# Altium PCB main.PcbDoc (part 2 of 2)
Units mm, origin at the board's own origin, x right, y up, seen from the top; angles counter-clockwise.
Board outline 97 x 82.5 mm, 4 copper layers (Top Layer, +5/3.3, GND, Bottom Layer), stack 1.656 mm thick; 92 components, 74 nets, 382 pads, 341 vias.
Unrouted connection lines stored in the file: 1.
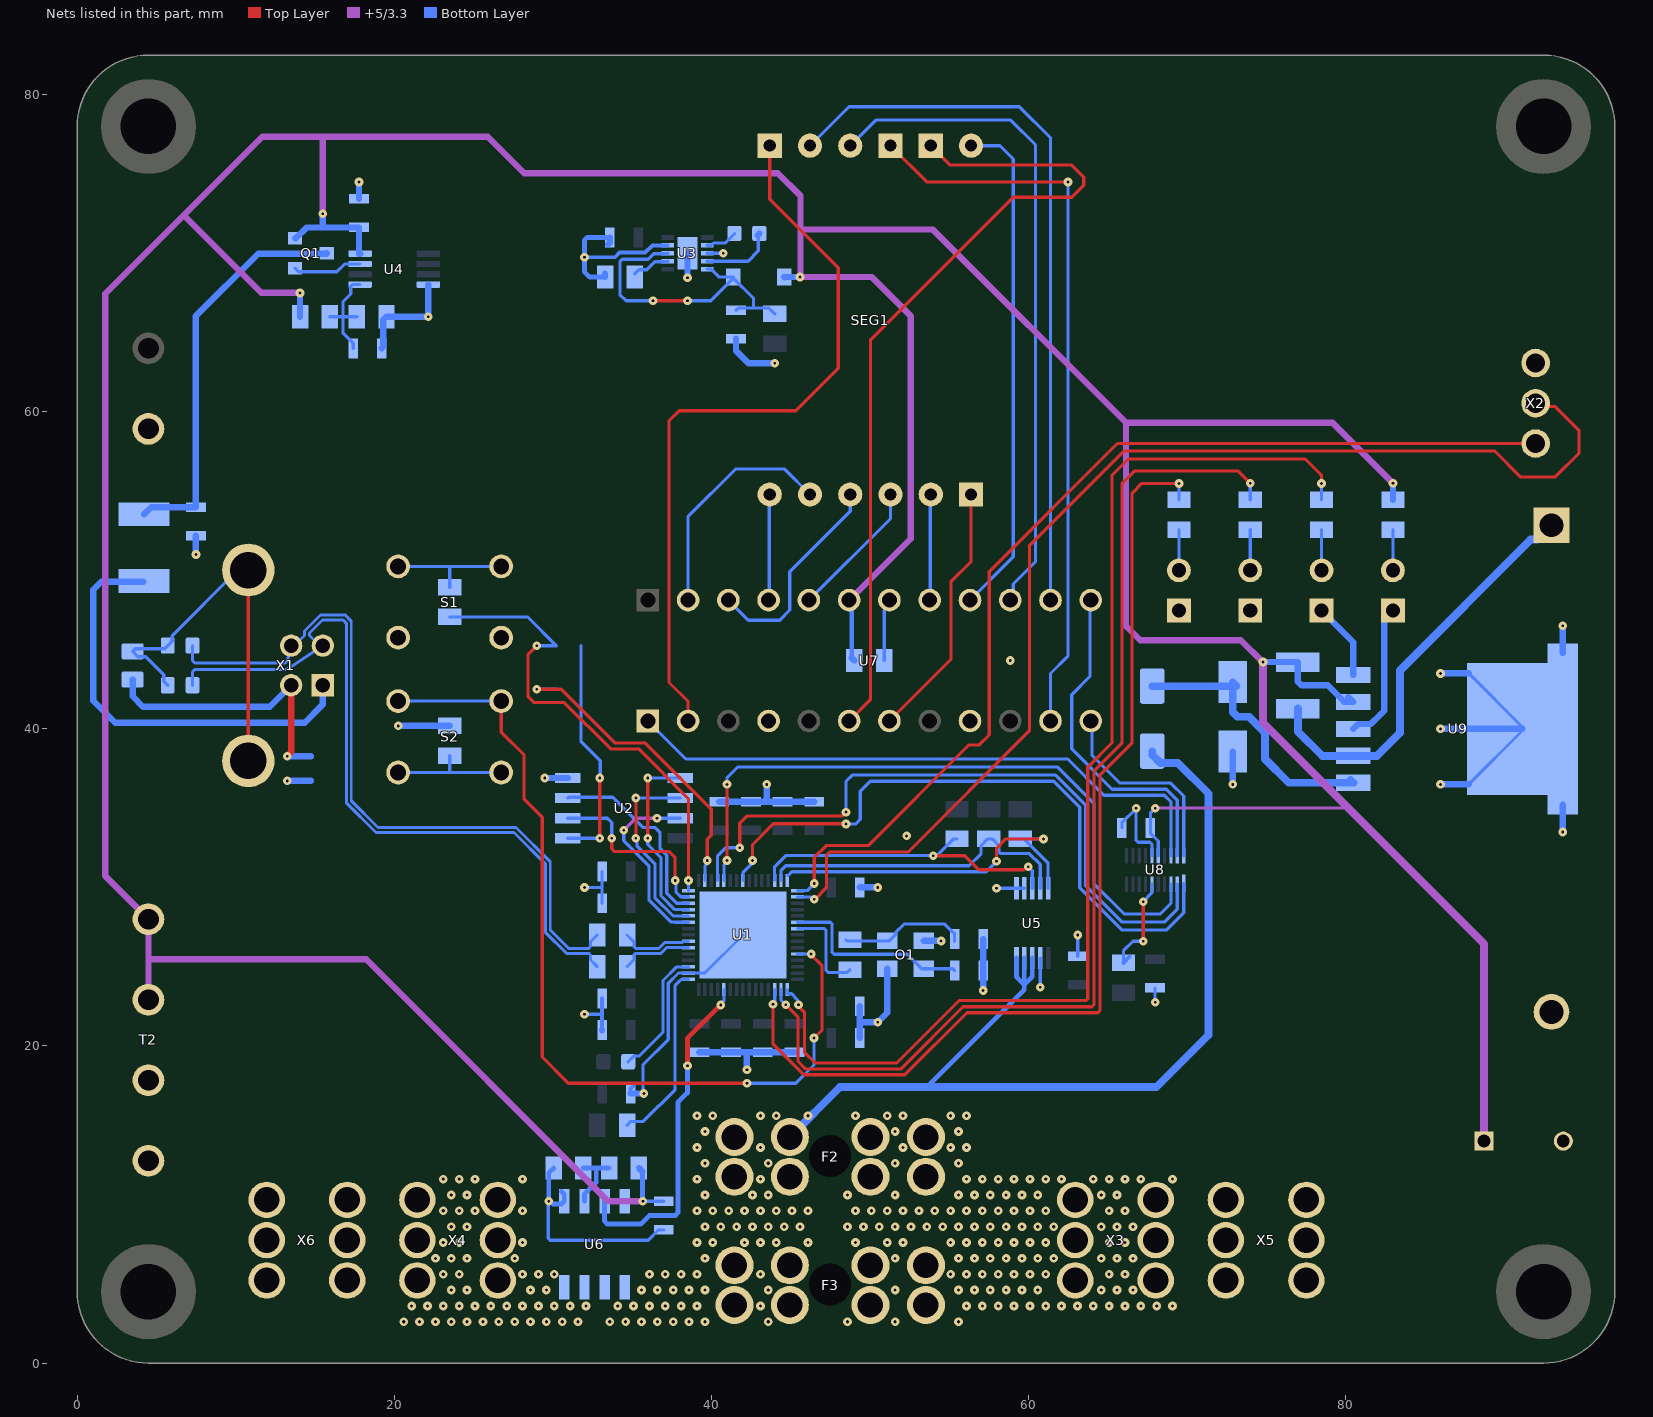
[diagram p4: the nets of this part, all layers, seen from the top]

## Via types
v1: diameter 0.55, hole 0.2, Top Layer to Bottom Layer, 240 vias
v2: diameter 0.55, hole 0.175, Top Layer to Bottom Layer, 101 vias

## Nets (pads, with @x,y where several pads share a name; then routed paths per layer and width w, separated by ;. In a path a pad name is that pad's centre, name@x,y a point inside that pad or via, vN(x,y) a via of type N, cw(c..) or ccw(c..) an arc to the next point about the centre after c; other vN are vias at no path point) (continued)
+5V: C23.2 C26.1 C28.1 C29.2 D5.2 L4.2 Q1.2 R11.2 R13.1 R16.1 R20.2 T2.1 T2.2 U4.8 U6.8 U7.19 U8.16 U9.4 | length 324.2
  +5/3.3 w0.2: v2(68,35) 80.189,35 80.2,34.989
  +5/3.3 w0.4: T2.2@4.5,22.92 4.5,25.46 ; v2(14.06,67.5) 11.621,67.5 6.731,72.39 ; v2(15.5,72.5) 15.5,77.222 15.621,77.343 ; v2(35.687,10.204) 33.484,10.204 18.228,25.46 4.5,25.46 ; v2(45.6,68.5) 50.118,68.5 52.578,66.04 52.578,51.998 U7.19@48.7,48.12 ; v2@45.627,68.527 45.627,71.501 ; v2@74.803,44.197 73.407,45.593 67.056,45.593 66.167,46.482 66.167,59.309 ; v2(83,55.5) 79.191,59.309 66.167,59.309 ; 4.5,25.46 T2.1@4.5,28 1.778,30.722 1.778,67.437 6.731,72.39 ; 6.731,72.39 11.684,77.343 15.621,77.343 ; 15.621,77.343 25.908,77.343 28.194,75.057 44.196,75.057 45.627,73.626 45.627,71.501 ; 45.627,71.501 53.975,71.501 66.167,59.309
  +5/3.3 w0.5: v2(74.803,44.216) 74.803,40.386 80.2,34.989 88.75,26.439 C26.1@88.75,14
  Bottom Layer w0.2: v2(35.687,10.204) 36.996,10.204 C29.2@37,10.2 ; v2(68,35) 68,34.975 67.7,34.675 C28.1@67.7,33.75 67.7,33.425 68.2,32.925 U8.16@68.2,32
  Bottom Layer w0.3: U6.8@34.544,10.204 v2(35.687,10.204) ; v2@35.658,10.233 R20.2@35.658,12.082 ; R13.1@48.865,44.474 U7.19@48.865,47.955
  Bottom Layer w0.4: Q1.2@13.75,70.95 13.8,70.95 14.478,71.628 15.4,71.628 ; R11.2@14.06,66 v2(14.06,67.5) ; v2(15.5,72.5) 15.5,71.728 15.4,71.628 ; U4.8@17.85,69.975 17.78,69.975 C23.2@17.78,71.628 15.4,71.628 ; R20.2@35.44,12.3 R20.2@35.658,12.082 ; D5.2@44.63,68.47 D5.2@44.6,68.5 v2(45.6,68.5) ; R13.1@48.865,44.474 R13.1@49.03,44.31 ; v2(74.803,44.216) L4.2@77,44.216 77,42.984 77.234,42.75 78.88,42.75 79.93,41.7 U9.4@80.5,41.7 U9.4@80.19,42.01 ; R16.1@83,54.44 v2(83,55.5)
Battery+: D6.2 F2.1 F3.1 U5.8 U5.9 U5.10 U6.1 U6.2 | length 63.6
  Bottom Layer w0.3: 53.53,17.335 53.594,17.399 59.75,23.555 59.75,23.876 ; U5.10@59.25,25.55 59.25,24.376 59.75,23.876 ; U5.9@59.75,25.55 59.75,23.876 ; U5.8@60.25,25.55 60.25,24.376 59.75,23.876
  Bottom Layer w0.5: F2.1@44.96,14.25 48.109,17.399 53.594,17.399 68.072,17.399 71.374,20.701 71.374,35.902 69.426,37.85 68.332,37.85 67.817,38.365 D6.2@67.817,38.59
  other v1: 33.6,2.6 34.6,2.6 35.6,2.6 36.6,2.6 37.6,2.6 38.6,2.6 39.6,2.6 43.6,2.6 34.1,3.6 35.1,3.6 36.1,3.6 37.1,3.6 38.1,3.6 39.1,3.6 43.1,3.6 35.6,4.6 36.6,4.6 37.6,4.6 38.6,4.6 39.6,4.6 43.6,4.6 36.1,5.6 37.1,5.6 38.1,5.6 39.1,5.6 43.1,5.6 39.6,6.6 39.1,7.6 40.1,7.6 42.1,7.6 43.1,7.6 44.1,7.6 46.1,7.6 39.6,8.6 40.6,8.6 41.6,8.6 42.6,8.6 43.6,8.6 44.6,8.6 45.6,8.6 39.1,9.6 40.1,9.6 41.1,9.6 42.1,9.6 43.1,9.6 44.1,9.6 45.1,9.6 46.1,9.6 39.6,10.6 42.6,10.6 43.6,10.6 39.1,11.6 43.1,11.6 39.6,12.6 43.6,12.6 39.1,13.6 43.1,13.6 39.6,14.6 39.1,15.6 40.1,15.6 43.1,15.6 44.1,15.6 46.1,15.6
"Current Sense": U1.41 U6.7 | length 21.5
  Top Layer w0.3: v2(38.5,18.75) 38.5,20.484 v2(40.6,22.584)
  Bottom Layer w0.2: v2@40.6,22.652 40.8,22.852 U1.41@40.8,23.56
  Bottom Layer w0.3: U6.7@33.274,10.204 33.274,8.939 33.45,8.763 35.56,8.763 36.097,9.3 37.724,9.3 37.9,9.476 37.9,16.437 38.5,17.037 v2(38.5,18.75)
D_DIG_0: SEG1.12 U7.2 | length 47.3
  Top Layer w0.2: U7.2@38.54,40.5 38.54,41.724 37.338,42.926 37.338,59.436 37.973,60.071 45.339,60.071 48.006,62.738 48.006,69.089 43.688,73.407 SEG1.12@43.688,76.786
D_DIG_1: SEG1.9 U7.11 | length 46.6
  Top Layer w0.203: SEG1.9@51.308,76.786 53.594,74.5 v2(62.5,74.5)
  Bottom Layer w0.203: U7.11@61.4,40.5 61.4,43.493 62.5,44.593 v2(62.5,74.5)
D_DIG_2: SEG1.8 U7.6 | length 53.2
  Top Layer w0.2: U7.6@48.7,40.5 50.038,41.838 50.038,64.516 59.055,73.533 62.738,73.533 63.5,74.295 63.5,74.803 62.738,75.565 55.069,75.565 SEG1.8@53.848,76.786
  Bottom Layer w0.203: SEG1.8@53.848,76.786 SEG1.8@53.975,76.659
D_DIG_3: SEG1.6 U7.7 | length 16.4
  Top Layer w0.2: U7.7@51.24,40.5 55.118,44.378 55.118,49.276 56.388,50.546 SEG1.6@56.388,54.786
D_ISET: R13.2 U7.18 | length 3.9
  Bottom Layer w0.203: R13.2@50.91,44.31 50.91,47.459 51.24,47.789 U7.18@51.24,48.12
"D_LOAD (C\S\\)": U1.8 U8.1 | length 41.4
  Top Layer w0.203: v2(42.6,31.7) 42.6,32.694 43.921,34.015 48.48,34.015 v2@48.498,33.998
  Bottom Layer w0.203: U1.8@42,30.44 42.008,30.448 42.008,30.959 v2@42.547,31.498 ; v2(48.5,34) 49.113,34 49.403,34.29 49.403,36.068 50.038,36.703 61.595,36.703 63.246,35.052 63.246,29.972 65.913,27.305 68.707,27.305 69.8,28.398 U8.1@69.8,30.25
"D_LOAD (C\S\\) 5V": U7.12 U8.20 | length 12.8
  Bottom Layer w0.2: U7.12@63.94,40.5 64.008,40.432 64.008,38.354 65.786,36.576 68.987,36.576 69.8,35.764 U8.20@69.8,32
D_N: R3.2 X1.2 Z2.2 | length 47.8
  Bottom Layer w0.185: Z2.2@7.28,42.75 7.28,43.527 cw(c7.498,43.527) 7.498,43.744 9.525,43.744 13.049,43.744 ccw(c13.049,44.374) 13.395,43.848 15.166,45.011 ccw(c15.047,45.193) 15.174,45.016 X1.2@15.5,45.25 X1.2@15.266,45.016 ; X1.2@15.298,45.25 14.656,45.892 14.656,46.045 15.474,46.863 16.782,46.863 16.98,46.665 16.98,44.537 16.98,42.926 16.98,36.449 16.98,35.344 18.854,33.47 27.559,33.47 29.533,31.496 29.533,27.176 30.864,25.844 32.274,25.844 32.383,25.735 32.383,25.428 R3.2@32.81,25
D_P: R2.2 X1.3 Z1.2 | length 46.2
  Bottom Layer w0.185: Z1.2@7.28,45.25 7.28,44.374 ccw(c7.498,44.374) 7.498,44.156 9.525,44.156 13.049,44.156 ccw(c13.049,44.374) 13.26,44.32 X1.3@13.5,45.25 ; X1.3@13.936,45.484 14.344,45.892 14.344,46.175 15.345,47.175 16.912,47.175 17.293,46.795 17.293,44.537 17.293,42.926 17.293,36.449 17.293,35.473 18.984,33.782 27.688,33.782 29.845,31.625 29.845,27.305 30.993,26.157 32.274,26.157 32.383,26.265 32.383,26.573 R2.2@32.81,27
D_Seg_A: SEG1.11 U7.14 | length 46.2
  Bottom Layer w0.203: SEG1.11@46.228,76.786 48.69,79.248 59.436,79.248 61.4,77.284 U7.14@61.4,48.12
D_Seg_B: SEG1.7 U7.16 | length 32
  Bottom Layer w0.203: U7.16@56.32,48.12 59.055,50.855 59.055,75.946 58.215,76.786 SEG1.7@56.388,76.786
D_Seg_C: SEG1.4 U7.20 | length 8.8
  Bottom Layer w0.203: U7.20@46.16,48.12 51.308,53.268 SEG1.4@51.308,54.786
D_Seg_D: SEG1.2 U7.23 | length 14.9
  Bottom Layer w0.203: U7.23@38.54,48.12 38.54,53.399 41.529,56.388 44.626,56.388 SEG1.2@46.228,54.786
D_Seg_DP: SEG1.3 U7.22 | length 13.5
  Bottom Layer w0.203: U7.22@41.08,48.12 42.345,46.855 44.315,46.855 44.958,47.498 44.958,49.911 48.766,53.719 48.766,54.784 SEG1.3@48.768,54.786
D_Seg_E: SEG1.1 U7.21 | length 6.7
  Bottom Layer w0.203: U7.21@43.62,48.12 43.654,48.154 43.654,54.752 SEG1.1@43.688,54.786
D_Seg_F: SEG1.10 U7.15 | length 42.4
  Bottom Layer w0.203: SEG1.10@48.768,76.786 50.384,78.402 58.885,78.402 60.452,76.835 60.452,50.546 59.043,49.137 59.043,48.303 U7.15@58.86,48.12
D_Seg_G: SEG1.5 U7.17 | length 6.7
  Bottom Layer w0.203: U7.17@53.78,48.12 53.814,48.154 53.814,54.752 SEG1.5@53.848,54.786
DX_N: R3.1 U1.51 | length 4.6
  Bottom Layer w0.185: R3.1@34.69,25 35.117,25.428 35.117,25.735 35.226,25.844 36.825,25.844 37.201,26.219 38.201,26.219 38.203,26.217 38.543,26.217 U1.51@38.56,26.2
DX_P: R2.1 U1.52 | length 4.6
  Bottom Layer w0.185: R2.1@34.69,27 35.117,26.573 35.117,26.265 35.226,26.157 36.696,26.157 37.071,26.532 38.187,26.532 38.255,26.6 U1.52@38.56,26.6 U1.52@38.56,26.6
"Flash SS": J1.2 J2.2 J3.2 U2.1 | length 14.7
  Top Layer w0.203: v2(32.963,33.095) v2(32.963,36.905)
  Bottom Layer w0.203: U2.1@30.95,33.095 v2(32.963,33.095) ; J3.2@31.78,45.25 J2.2@31.78,42.5 J1.2@31.78,39.75 31.78,39.22 33,38 33,36.942 v2(32.963,36.905)
GND: C1.1 C2.1 C3.1 C4.1 C5.1 C6.1 C7.1 C8.1 C9.1 C10.1 C11.2 C12.1 C13.1 C14.1 C15.1 C16.1 C17.1 C18.1 C19.2 C20.2 C21.1 C22.1 C23.1 C24.1 C25.2 C26.2 C27.2 C28.2 C29.1 D1.2 D2.2 D3.2 D4.2 D7.2 J4.1 O1.2 O1.4 R10.1 R12.1 R15.2 R21.1 S1.3 S1.4 T1.2 T2.3 T2.4 U1.47 U1.61 U2.4 U3.3 U3.9 U3.11 U4.4 U5.1 U5.2 U5.7 U6.5 U7.4 U7.9 U8.15 U9.3 U9.5 U9.6 X2.3 X5.1 X6.1 | length 143.6
  Bottom Layer w0.2: v2(29.75,10.204) 29.718,10.172 29.718,7.864 29.835,7.747 36.022,7.747 36.675,8.4 C29.1@37,8.4 ; v2(32,30) 33.11,30 ; C7.1@33.11,29 33.11,30 ; C6.1@33.11,31 33.11,30 ; v2(35.75,17) 35.687,17.063 35.687,18.796 37.29,20.399 37.29,23.954 37.936,24.6 U1.47@38.56,24.6 39.6,24.6 U1.61@42,27 ; U3.3@39.75,70 v2(40.75,70) ; v2(58,29.95) U5.1@59.25,29.95 U5.2@59.75,29.95 ; v2(60.75,23.7) U5.7@60.75,25.55 ; C19.2@63.119,25.65 v2(63.119,27) ; C28.2@65.9,33.75 65.9,34.075 66.8,34.975 v2(66.8,35) 66.8,32.967 66.917,32.85 67.675,32.85 67.8,32.725 U8.15@67.8,32 ; v2(68,22.75) C27.2@68,23.659 ; U9.6@87.78,36.5 91.175,39.895 U9.6@91.175,40 91.175,40.105 U9.6@87.78,43.5
  Bottom Layer w0.25: v2(32,22) 33.01,22 33.11,22.1 ; v2(32,69.75) 33.923,69.75 34.219,70.046 35.831,70.046 36.285,70.5 37,70.5 U3.9@37.25,70.5 ; C9.1@33.11,21 33.11,22.1 ; C8.1@33.11,23 33.11,22.1
  Bottom Layer w0.254: C10.1@34.91,17 34.91,17.305 C10.1@35.083,17.478 ; U3.9@36.977,70.477 U3.9@37,70.5
  Bottom Layer w0.3: v2(29.75,10.204) 29.75,11.99 R21.1@30.06,12.3 ; v2@29.845,10.209 30.021,10.033 30.563,10.033 U6.5@30.734,10.204 30.734,10.643 U6.5@30.559,10.818 ; R10.1@33.3,68.5 32.33,68.5 32,68.83 v2(32,69.75) 32,70.81 32.19,71 C22.1@33.6,71
  Bottom Layer w0.4: v2(7.493,51) C20.2@7.493,52.185 ; v2(13.25,36.72) J4.1@14.75,36.72 ; C23.1@17.78,73.428 v2(17.78,74.5) ; C24.1@19.215,64 19.315,64.1 19.315,65.8 R12.1@19.515,66 v2(22.15,66) U4.4@22.15,68.025 ; v2(20.25,40.19) R15.2@23.5,40.19 ; v2(29.5,36.905) U2.4@30.95,36.905 ; R10.1@33.3,68.5 R10.1@33.3,68.715 ; C22.1@33.5,70.575 33.6,70.675 C22.1@33.6,71 ; C10.1@34.91,17 v2(35.75,17) ; v2(38.5,68.45) U3.11@38.5,70 ; C11.2@39.25,19.6 C12.1@41.25,19.6 42.35,19.6 ; C5.1@40.5,35.4 C4.1@42.5,35.4 43.6,35.4 ; C21.1@41.565,64.6 41.565,63.845 42.35,63.06 v2(44,63.06) ; v2(42.25,18.5) 42.25,19.5 42.35,19.6 ; v2(43.5,36.5) 43.5,35.5 43.6,35.4 ; C14.1@45.25,19.6 C13.1@43.25,19.6 42.35,19.6 ; C2.1@46.5,35.4 C3.1@44.5,35.4 43.6,35.4 ; C15.1@49.365,20.5 49.365,21.4 ; C16.1@49.365,22.5 49.365,21.4 ; C1.1@49.365,30 v2(50.5,30) ; O1.2@51.1,24.875 51.1,22.1 v2(50.5,21.5) 49.465,21.5 49.365,21.4 ; O1.4@53.4,26.625 v2(54.5,26.625) ; v2(57.15,23.5) C17.1@57.15,24.75 C18.1@57.15,26.75 ; v2(72.897,36.5) C25.2@72.897,38.567 ; D2.2@78.5,47.46 80.5,45.46 U9.5@80.5,43.4 ; U9.3@80.5,40 80.81,40.31 81.605,40.31 82.189,40.894 ; 82.189,40.894 82.45,41.155 82.45,46.91 D1.2@83,47.46 ; v2(86,36.5) U9.6@87.78,36.5 ; v2(86,40) U9.6@91.175,40 ; v2(86,43.5) U9.6@87.78,43.5 ; v2(93.715,33.5) U9.6@93.715,35.217 ; U9.6@93.715,44.782 v2(93.715,46.5)
  other v2: 52.324,33.25 58.86,44.31
GPIO0: J2.1 U1.2 | length 19.8
  Top Layer w0.203: v2(29,42.5) 30.525,42.5 33.909,39.116 35.814,39.116 40,34.93 40,33.287 39.751,33.038 v2(39.751,31.7)
  Bottom Layer w0.203: v2(29,42.5) J2.1@30.22,42.5 ; U1.2@39.6,30.44 39.6,31.349 v2@39.751,31.5
"Green LED": R17.1 U1.31 | length 73.7
  Top Layer w0.203: v2@45.4,22.6 45.875,22.125 45.875,19.6 46.552,18.923 51.689,18.923 55.626,22.86 63.635,22.86 63.754,22.979 63.754,37.592 65.278,39.116 65.278,56.007 66.294,57.023 77.456,57.023 78.367,56.112 78.5,55.979 v2(78.5,55.485)
  Bottom Layer w0.2: R17.1@78.5,54.44 v2(78.5,55.485)
  Bottom Layer w0.203: U1.31@44.808,23.552 44.808,23.293 45.067,23.293 45.434,22.926 45.434,22.666 v2(45.5,22.6)
LM2576_OUTPUT: D7.1 L4.1 U9.2 | length 26.4
  Bottom Layer w0.203: D7.1@92.088,51.938 D7.1@93,52.85
  Bottom Layer w0.5: L4.1@77,41.284 77,39.84 78.54,38.3 U9.2@80.5,38.3 81.988,38.3 83.439,39.751 83.439,43.688 91.689,51.938 D7.1@92.088,51.938
LM2576_VIN: C25.1 D6.1 U9.1 | length 17.4
  Bottom Layer w0.5: D6.1@67.817,42.69 C25.1@72.62,42.69 ; C25.1@72.897,42.699 72.897,41.06 73.19,40.767 73.914,40.767 74.93,39.751 74.93,38.1 76.43,36.6 U9.1@80.5,36.6 U9.1@80.313,36.787 ; C25.1@72.897,42.917 73.006,42.808 C25.1@73.115,42.699
Load+: U6.3 U6.4 X4.1
  other v1: 20.6,2.6 21.6,2.6 22.6,2.6 23.6,2.6 24.6,2.6 25.6,2.6 26.6,2.6 27.6,2.6 28.6,2.6 29.6,2.6 30.6,2.6 31.6,2.6 21.1,3.6 22.1,3.6 23.1,3.6 24.1,3.6 25.1,3.6 26.1,3.6 27.1,3.6 28.1,3.6 29.1,3.6 30.1,3.6 31.1,3.6 32.1,3.6 23.6,4.6 24.6,4.6 28.6,4.6 29.6,4.6 23.1,5.6 24.1,5.6 28.1,5.6 29.1,5.6 30.1,5.6 22.6,6.6 23.6,6.6 24.6,6.6 27.6,6.6 23.1,7.6 24.1,7.6 28.1,7.6 23.6,8.6 24.6,8.6 23.1,9.6 24.1,9.6 25.1,9.6 28.1,9.6 23.6,10.6 24.6,10.6 23.1,11.6 24.1,11.6 25.1,11.6 28.1,11.6
LX1: L1.1 U3.4 | length 4.7
  Bottom Layer w0.2: U3.4@39.75,69.5 42.322,69.5 42.97,70.148 42.97,71.097 L1.1@42.926,71.141
  Bottom Layer w0.4: L1.1@42.926,71.141 L1.1@43.035,71.25
LX2: L1.2 U3.2 | length 2
  Bottom Layer w0.203: U3.2@39.75,70.5 40,70.5 40.148,70.648 40.881,70.648 41.465,71.232 L1.2@41.465,71.25
MOSI1: U1.5 U8.3 | length 43.2
  Top Layer w0.203: v2(40.994,31.7) v2(40.994,36.5)
  Bottom Layer w0.203: U1.5@40.808,30.448 U1.5@40.8,30.44 40.8,31.412 40.994,31.606 v2(40.994,31.7) ; v2(40.994,36.5) 40.994,36.93 41.656,37.592 61.857,37.592 64.135,35.314 64.135,30.226 66.04,28.321 68.326,28.321 69,28.995 U8.3@69,30.2
"MOSI1 5V": U7.1 U8.18 | length 38.5
  Bottom Layer w0.2: U7.1@36,40.5 38.4,38.1 62.484,38.1 64.77,35.814 68.58,35.814 69,35.394 U8.18@69,32
NetC18_2: C18.2 O1.3 R1.2 | length 8
  Bottom Layer w0.203: R1.2@48.5,26.69 48.565,26.625 50.85,26.625 O1.3@50.975,26.625 ; O1.3@51.1,26.625 51.225,26.625 51.649,27.049 51.649,27.174 52.161,27.686 54.728,27.686 55.141,27.273 55.152,27.273 55.35,27.075 C18.2@55.35,26.597
NetC21_2: C21.2 D5.1 R9.2 U3.5 U3.8 | length 20.1
  Top Layer w0.203: v2(36.322,67) v2(38.5,67)
  Bottom Layer w0.203: v2(36.322,67) 34.627,67 34.24,67.387 34.24,69.463 34.396,69.619 36.013,69.619 36.368,69.975 37.225,69.975 U3.8@37.25,70 ; v2(38.5,67) 39.98,67 41.4,68.42 42.672,67.148 42.672,66.548 ; U3.5@39.75,69 40,69 40.5,68.5 D5.1@41.4,68.5 ; C21.2@41.565,66.4 41.713,66.548 42.672,66.548 ; R9.2@44,66.18 43.632,66.548 42.672,66.548
NetD1_1: D1.1 R16.2 | length 2.6
  Bottom Layer w0.203: D1.1@83,50 R16.2@83,52.56
NetD2_1: D2.1 R17.2 | length 2.6
  Bottom Layer w0.203: D2.1@78.5,50 R17.2@78.5,52.56
NetD3_1: D3.1 R18.2 | length 2.6
  Bottom Layer w0.203: D3.1@74,50 R18.2@74,52.56
NetD4_1: D4.1 R19.2 | length 2.6
  Bottom Layer w0.203: D4.1@69.5,50 R19.2@69.5,52.56
NetF2_2: F2.2 F3.2 X3.1
  other v1: 48.6,2.6 51.6,2.6 55.6,2.6 56.1,3.6 57.1,3.6 58.1,3.6 59.1,3.6 60.1,3.6 61.1,3.6 62.1,3.6 63.1,3.6 64.1,3.6 65.1,3.6 66.1,3.6 67.1,3.6 68.1,3.6 69.1,3.6 51.6,4.6 55.6,4.6 56.6,4.6 57.6,4.6 58.6,4.6 59.6,4.6 60.6,4.6 64.6,4.6 65.6,4.6 66.6,4.6 55.1,5.6 56.1,5.6 57.1,5.6 58.1,5.6 59.1,5.6 60.1,5.6 61.1,5.6 65.1,5.6 66.1,5.6 51.6,6.6 55.6,6.6 56.6,6.6 57.6,6.6 58.6,6.6 59.6,6.6 60.6,6.6 61.6,6.6 64.6,6.6 65.6,6.6 66.6,6.6 49.1,7.6 51.1,7.6 52.1,7.6 55.1,7.6 56.1,7.6 57.1,7.6 58.1,7.6 59.1,7.6 60.1,7.6 61.1,7.6 65.1,7.6 66.1,7.6 48.6,8.6 49.6,8.6 50.6,8.6 51.6,8.6 52.6,8.6 53.6,8.6 54.6,8.6 55.6,8.6 56.6,8.6 57.6,8.6 58.6,8.6 59.6,8.6 60.6,8.6 61.6,8.6 64.6,8.6 65.6,8.6 66.6,8.6 49.1,9.6 50.1,9.6 51.1,9.6 52.1,9.6 53.1,9.6 54.1,9.6 55.1,9.6 56.1,9.6 57.1,9.6 58.1,9.6 59.1,9.6 60.1,9.6 61.1,9.6 65.1,9.6 66.1,9.6 48.6,10.6 51.6,10.6 55.6,10.6 56.6,10.6 57.6,10.6 58.6,10.6 59.6,10.6 60.6,10.6 64.6,10.6 65.6,10.6 56.1,11.6 57.1,11.6 58.1,11.6 59.1,11.6 60.1,11.6 61.1,11.6 62.1,11.6 64.1,11.6 65.1,11.6 66.1,11.6 67.1,11.6 69.1,11.6 51.6,12.6 55.6,12.6 52.1,13.6 55.1,13.6 56.1,13.6 51.6,14.6 55.6,14.6 49.1,15.6 51.1,15.6 52.1,15.6 55.1,15.6 56.1,15.6
NetL3_1: L3.1 X1.S1 X1.S2 Z1.1 Z2.1 | length 24.8
  Top Layer w0.203: X1.S2@10.8,37.98 X1.S1@10.8,50.02
  Bottom Layer w0.203: Z2.1@5.72,42.75 5.47,43 5.47,43.425 4.341,44.554 3.835,44.554 L3.1@3.5,44.889 3.67,45.059 5.529,45.059 5.999,45.529 5.999,45.877 10.142,50.02 X1.S1@10.55,50.02
NetR8_2: R8.2 U8.6 | length 6.6
  Top Layer w0.203: v2(67.249,26.6) v2(67.249,29.1)
  Bottom Layer w0.203: R8.2@66,25.239 66,25.995 66.605,26.6 v2(67.249,26.6) ; v2(67.249,29.1) 67.8,29.651 U8.6@67.8,30.2
  Bottom Layer w0.25: R8.2@66,25.239 R8.2@66.395,25.634
NetR10_2: R10.2 U3.7 | length 2.4
  Bottom Layer w0.203: R10.2@35.18,68.715 35.426,68.961 35.934,68.961 36.444,69.471 37.221,69.471 U3.7@37.25,69.5
NetR15_1: R15.1 S2.3 S2.4 | length 7.6
  Bottom Layer w0.203: S2.3@20.25,37.25 23.5,37.25 ; R15.1@23.5,38.31 23.5,37.25 ; S2.4@26.75,37.25 23.5,37.25
NetR20_1: R20.1 R21.2 U6.6 | length 4
  Bottom Layer w0.3: R21.2@31.94,12.3 32.75,12.3 ; U6.6@32.004,10.204 32.004,10.643 32.75,11.389 32.75,12.3 ; R20.1@33.56,12.3 32.75,12.3
"Op B (+) Input": C24.2 R11.1 R12.2 U4.5 | length 6.7
  Bottom Layer w0.203: R11.1@15.94,66 16.764,66 ; C24.2@17.415,64 17.415,64.325 16.764,64.976 16.764,66 ; R12.2@17.635,66 16.764,66 ; U4.5@17.85,68.025 17.365,68.025 17.267,67.927 17.267,67.432 16.764,66.929 16.764,66
"Op B Output": Q1.1 U4.7 | length 4.4
  Bottom Layer w0.203: Q1.1@13.75,69.05 13.966,68.834 16.383,68.834 16.874,69.325 U4.7@17.85,69.325
QSPI_SCLK: U1.56 U2.6 | length 12.1
  Top Layer w0.203: v2@35.246,33.097 v2(35.246,35.635)
  Bottom Layer w0.203: v2@35.246,33.097 35.313,33.03 35.313,32.632 36.449,31.496 36.449,29.346 37.598,28.197 37.79,28.197 37.793,28.2 ; v2(35.246,35.635) U2.6@38.05,35.635 ; 37.84,28.2 U1.56@38.56,28.2
  other v2: 35.241,33.097
QSPI_SD0: U1.57 U2.5 | length 11.9
  Top Layer w0.203: v2(36,33.097) v2(36,36.905)
  Bottom Layer w0.203: v2(36,33.097) 36,32.707 36.83,31.877 36.83,29.479 37.709,28.6 U1.57@38.56,28.6 ; v2(36,36.905) U2.5@38.05,36.905
QSPI_SD1: U1.59 U2.2 | length 11.9
  Top Layer w0.203: v2(33.722,33.097) 33.722,32.441 33.906,32.258 37.338,32.258 37.721,31.875 37.721,30.449 v2(37.73,30.44)
  Bottom Layer w0.203: U2.2@30.95,34.365 33.453,34.365 33.722,34.096 v2(33.722,33.097) ; v2(37.73,30.44) 37.769,30.4 37.769,29.712 38.073,29.408 38.552,29.408 U1.59@38.56,29.4
QSPI_SD2: U1.58 U2.3 | length 12.4
  Bottom Layer w0.203: U2.3@30.95,35.635 31.003,35.687 33.782,35.687 35.687,33.782 36.449,33.782 36.772,33.459 36.772,32.448 37.193,32.027 37.193,29.629 37.822,29 U1.58@38.56,29
QSPI_SD3: U1.55 U2.7 | length 12
  +5/3.3 w0.203: v2(34.481,33.6) 35.246,34.365 v2(36.576,34.365)
  Bottom Layer w0.203: v2(34.481,33.6) 34.481,32.956 36.068,31.369 36.068,29.213 37.468,27.813 37.719,27.813 37.732,27.8 U1.55@38.56,27.8 ; v2(36.576,34.365) U2.7@38.05,34.365
QSPI_SS: J3.1 R14.2 U1.60 | length 30.6
  Top Layer w0.203: v2(29,45.25) 28.448,44.698 28.448,42.037 28.829,41.656 30.734,41.656 33.655,38.735 35.42,38.735 38.56,35.595 v2@38.56,30.5
  Bottom Layer w0.203: R14.2@23.5,47.06 28.41,47.06 J3.1@30.22,45.25 v2(29,45.25) ; U1.60@38.56,29.8 v2(38.56,30.44)
"Red LED": R19.1 U1.33 | length 64.3
  Top Layer w0.203: v2@43.902,22.595 43.9,22.593 43.9,20.102 45.824,18.179 52.215,18.179 56.134,22.098 64.397,22.098 64.516,22.217 64.516,37.084 66.548,39.116 66.548,54.864 67.169,55.485 v2(69.5,55.485)
  Bottom Layer w0.2: R19.1@69.5,54.44 v2(69.5,55.485)
  Bottom Layer w0.203: v2(43.9,22.627) 43.9,22.721 44,22.821 U1.33@44,23.56
RUN: S2.1 S2.2 U1.26 | length 56.7
  Top Layer w0.203: S2.2@26.75,41.75 26.75,39.798 28.194,38.354 28.194,35.56 29.337,34.417 29.337,19.304 30.988,17.653 v2(42.25,17.653) ; v2@46.25,25.8 46.99,25.06 46.99,21.008 v2(46.482,20.5)
  Bottom Layer w0.203: S2.1@20.25,41.75 S2.2@26.75,41.75 ; v2(42.25,17.653) 45.339,17.653 46.482,18.796 v2(46.482,20.5) ; U1.26@45.44,25.8 v2@46.25,25.8
  other v2: 46.3,25.8
RXD1: U1.17 X2.2 | length 75.3
  Top Layer w0.203: v2@46.519,29.231 47.265,29.977 47.265,32.025 47.476,32.236 52.428,32.236 60.071,39.879 60.071,51.562 66.04,57.531 89.408,57.531 91.059,55.88 93.218,55.88 94.742,57.404 94.742,58.801 93.205,60.338 92.202,60.338 X2.2@92,60.54
  Bottom Layer w0.203: U1.17@45.44,29.4 46.256,29.4 46.468,29.188 v2@46.524,29.188
  other v2: 46.5,29.25
SCK1: U1.4 U8.2 | length 43.4
  Top Layer w0.203: v2(41.8,32.5) 41.8,34.053 42.247,34.5 48.25,34.5 v2(48.5,34.75)
  Bottom Layer w0.203: U1.4@40.4,30.44 40.4,31.99 40.91,32.5 v2(41.8,32.5) ; v2(48.5,34.75) 48.5,36.689 48.895,37.084 61.722,37.084 63.627,35.179 63.627,30.099 65.913,27.813 68.58,27.813 69.4,28.633 U8.2@69.4,30.2
"SCK1 5V": U7.13 U8.19 | length 21.7
  Top Layer w0.2: U7.13@63.706,47.885 U7.13@63.94,48.12
  Bottom Layer w0.2: U7.13@63.94,48.12 63.881,48.061 63.881,43.307 62.738,42.164 62.738,38.735 65.278,36.195 68.707,36.195 69.4,35.502 U8.19@69.4,32
SCL: R7.1 U1.15 U5.5 | length 22.8
  Top Layer w0.203: v2(58,31.65) 58,32.473 58.587,33.06 v2(60.96,33.06)
  Bottom Layer w0.203: U1.15@44.808,30.753 44.855,30.753 45.09,30.988 57.338,30.988 v2(58,31.65) ; R7.1@59.5,33.06 R7.1@59.715,33.06 ; v2(60.96,33.06) R7.1@59.715,33.06 ; U5.5@61.25,29.95 61.25,31.525 R7.1@59.715,33.06
SDA: R6.1 U1.14 U5.4 | length 20.4
  Bottom Layer w0.203: U1.14@44.4,30.44 44.408,30.448 44.408,31.081 44.696,31.369 56.261,31.369 57.023,32.131 57.023,32.642 R6.1@57.441,33.06 ; R6.1@57.5,33.06 57.713,33.06 58.131,32.642 58.131,32.25 58.25,32.131 60.071,32.131 60.75,31.452 U5.4@60.75,29.95
TXD1: U1.16 X2.1 | length 65.2
  Top Layer w0.203: v2(46.5,30.25) 46.5,31.895 47.244,32.639 49.911,32.639 56.261,38.989 56.904,38.989 57.531,39.616 57.531,49.911 65.62,58 X2.1@92,58
  Bottom Layer w0.203: U1.16@45.44,29.8 46.05,29.8 v2(46.5,30.25)
U\S\B\_\B\O\O\T\: R14.1 S1.1 S1.2 | length 7.8
  Bottom Layer w0.203: S1.1@20.25,50.25 23.5,50.25 ; R14.1@23.5,48.94 23.5,50.25 ; S1.2@26.75,50.25 23.5,50.25
USBGND: J4.2 L3.2 X1.4 | length 18
  Top Layer w0.4: v2(13.25,38.28) 13.25,38.289 13.5,38.539 X1.4@13.5,42.75
  Bottom Layer w0.4: L3.2@3.5,43.111 3.5,42.053 4.151,41.402 12.152,41.402 X1.4@13.5,42.75 ; v2(13.25,38.28) J4.2@14.75,38.28
USBVCC: C20.1 F1.2 Q1.3 | length 25.4
  Bottom Layer w0.4: F1.2@4.223,53.535 4.673,53.985 C20.1@7.493,53.985 7.493,66.04 11.43,69.977 15.727,69.977 Q1.3@15.75,70
"USBVCC - Raw": F1.1 X1.1 | length 27.1
  Bottom Layer w0.4: F1.1@4.164,49.276 1.524,49.276 1.016,48.768 1.016,41.783 2.413,40.386 14.351,40.386 15.5,41.535 X1.1@15.5,42.75
Voltage_Alert: R5.1 U1.13 U5.3 | length 21
  Top Layer w0.2: v2(54,32) 56,32 56.885,31.115 59.72,31.115 59.905,31.3 v2(60,31.3)
  Bottom Layer w0.2: U1.13@44,30.44 44,31.3 44.704,32.004 v2@54,32.004 ; v2(54,32) 54.067,32.067 54.292,32.067 55.285,33.06 R5.1@55.5,33.06 ; v2(60,31.3) 60.25,31.05 U5.3@60.25,29.95
VREG_AVDD: R4.1 U1.46 | length 11.5
  Bottom Layer w0.203: R4.1@34.69,15 34.93,15.24 35.715,15.24 37.719,17.244 37.719,23.819 37.973,24.073 38.092,24.192 38.552,24.192 U1.46@38.56,24.2
VREG_LX: L2.2 U1.48 | length 8.2
  Bottom Layer w0.2: 35.472,19.363 35.472,19.383 36.957,20.868 36.957,24.13 37.817,24.99 38.55,24.99 U1.48@38.552,24.992
  Bottom Layer w0.203: L2.2@34.76,19 34.76,19.017 35.106,19.363 35.472,19.363
XIN: C17.2 O1.1 U1.21 | length 12.2
  Bottom Layer w0.203: U1.21@45.44,27.8 47.506,27.8 47.625,27.681 47.625,25.9 47.744,25.781 52.37,25.781 53.275,24.875 O1.1@53.4,24.875 55.225,24.875 C17.2@55.35,24.75
XOUT: R1.1 U1.22 | length 6
  Bottom Layer w0.203: U1.22@45.44,27.4 47.125,27.4 47.244,27.281 47.244,24.757 47.363,24.638 48.578,24.638 R1.1@48.75,24.81
"Yellow LED": R18.1 U1.32 | length 68.9
  Top Layer w0.203: v2(44.7,22.6) 45.466,21.834 45.466,19.05 45.974,18.542 51.943,18.542 55.88,22.479 64.016,22.479 64.135,22.598 64.135,37.338 65.913,39.116 65.913,55.499 66.675,56.261 73.239,56.261 v2(74,55.5)
  Bottom Layer w0.2: R18.1@74,54.44 v2(74,55.5)
  Bottom Layer w0.203: U1.32@44.4,23.56 44.4,22.879 44.667,22.613 v2@44.667,22.6
pads on no net: F2. F3. U1.3 U1.7 U1.9 U1.10 U1.12 U1.18 U1.19 U1.24 U1.25 U1.27 U1.28 U1.29 U1.34 U1.35 U1.36 U1.37 U1.40 U1.42 U1.43 U4.1 U4.2 U4.3 U7.3 U7.5 U7.8 U7.10 U7.24 U8.4 U8.7 U8.8 U8.9 U8.10 U8.11 U8.12 U8.13 U8.14 U8.17

## Polygon pours and split planes (outlines as drawn)
GND on Bottom Layer "NONET_L01_P-001" (hatched 45Degree grid 0.508 track 0.203, remove dead copper, pour order 33): 92.5,82.5 4.5,82.5 ccw(c4.5,78) 0,78 0,4.5 ccw(c4.5,4.5) 4.5,0 92.5,0 ccw(c92.5,4.5) 97,4.5 97,78 ccw(c92.5,78)
NetF2_2 on Bottom Layer "NONET_L01_P-001" (solid, pour order 23): 48,16.4 56.5,16.4 56.5,12.29 70.04,12.29 70.04,3.21 56.5,3.21 56.5,1.5 48,1.5
Load+ on Bottom Layer "NONET_L01_P-001" (solid, pour order 18): 32.4,6.25 28.75,6.25 28.75,12.29 19.5,12.29 19.5,1.5 32.4,1.5
Battery+ on Bottom Layer "NONET_L01_P-001" (solid, pour order 22): 32.8,6.25 32.8,1.5 47,1.5 47,16.4 38.5,16.4 38.5,6.25
GND on Top Layer "NONET_L01_P-001" (hatched 45Degree grid 0.508 track 0.203, remove dead copper, pour order 32): 92.5,82.5 4.5,82.5 ccw(c4.5,78) 0,78 0,4.5 ccw(c4.5,4.5) 4.5,0 92.5,0 ccw(c92.5,4.5) 97,4.5 97,78 ccw(c92.5,78)
Load+ on Top Layer "NONET_L01_P-001" (solid, pour order 27): 28.75,12.29 19.5,12.29 19.5,1.5 32.4,1.5 32.4,6.25 28.75,6.25
NetF2_2 on Top Layer "NONET_L01_P-001" (solid, pour order 26): 56.5,16.4 48,16.4 48,1.5 56.5,1.5 56.5,3.21 70.04,3.21 70.04,12.29 56.5,12.29
Battery+ on Top Layer "NONET_L01_P-001" (solid, pour order 19): 47,16.4 38.5,16.4 38.5,6.25 32.8,6.25 32.8,1.5 47,1.5
GND on +5/3.3 "NONET_L01_P-001" (solid, pour order 31): 97,9 88,9 88,0 70.5,0 70.5,13.5 57.25,13.5 57.25,17 37.75,17 37.75,7 29.5,7 29.5,13.5 18.5,13.5 18.5,0 9,0 9,9 0,9 0,73.5 9,73.5 9,82.5 88,82.5 88,73.5 97,73.5
Load+ on +5/3.3 "NONET_L01_P-001" (solid, pour order 28): 28.75,12.29 19.5,12.29 19.5,1.5 32.4,1.5 32.4,6.25 28.75,6.25
NetF2_2 on +5/3.3 "NONET_L01_P-001" (solid, pour order 25): 70.04,12.29 70.04,3.21 56.5,3.21 56.5,1.5 48,1.5 48,16.4 56.5,16.4 56.5,12.29
Battery+ on +5/3.3 "NONET_L01_P-001" (solid, pour order 20): 47,1.5 32.8,1.5 32.8,6.25 38.5,6.25 38.5,16.4 47,16.4
GND on GND "NONET_L01_P-001" (solid, pour order 30): 97,73.5 88,73.5 88,82.5 9,82.5 9,73.5 0,73.5 0,9 9,9 9,0 18.5,0 18.5,13.5 29.5,13.5 29.5,7 37.75,7 37.75,17 57.25,17 57.25,13.5 70.5,13.5 70.5,0 88,0 88,9 97,9
Load+ on GND "NONET_L01_P-001" (solid, pour order 29): 28.75,12.29 19.5,12.29 19.5,1.5 32.4,1.5 32.4,6.25 28.75,6.25
NetF2_2 on GND "NONET_L01_P-001" (solid, pour order 24): 70.04,12.29 70.04,3.21 56.5,3.21 56.5,1.5 48,1.5 48,16.4 56.5,16.4 56.5,12.29
Battery+ on GND "NONET_L01_P-001" (solid, pour order 21): 47,16.4 38.5,16.4 38.5,6.25 32.8,6.25 32.8,1.5 47,1.5
Load+ on Top Solder "NONET_L01_P-001" (solid): 32.4,6.25 32.4,1.5 19.5,1.5 19.5,12.29 28.75,12.29 28.75,6.25
Battery+ on Top Solder "NONET_L01_P-001" (solid): 47,16.4 38.5,16.4 38.5,6.25 32.8,6.25 32.8,1.5 47,1.5
NetF2_2 on Top Solder "NONET_L01_P-001" (solid): 56.5,16.4 48,16.4 48,1.5 56.5,1.5 56.5,3.21 70.04,3.21 70.04,12.29 56.5,12.29
NetF2_2 on Bottom Solder "NONET_L01_P-001" (solid): 56.5,16.4 48,16.4 48,1.5 56.5,1.5 56.5,3.21 70.04,3.21 70.04,12.29 56.5,12.29
Battery+ on Bottom Solder "NONET_L01_P-001" (solid): 47,16.4 38.5,16.4 38.5,6.25 32.8,6.25 32.8,1.5 47,1.5
Load+ on Bottom Solder "NONET_L01_P-001" (solid): 28.75,12.29 19.5,12.29 19.5,1.5 32.4,1.5 32.4,6.25 28.75,6.25

## Keep-outs
Keep-Out Layer:
  the board outline again, w0.254

## Other copper
Top Layer:
  pour cut-out: 4.5,73.5 ccw(c4.5,78) 9,78 ccw(c4.5,78) 4.5,82.5 ccw(c4.5,78) 0,78 ccw(c4.5,78)
  pour cut-out: 4.5,0 ccw(c4.5,4.5) 9,4.5 ccw(c4.5,4.5) 4.5,9 ccw(c4.5,4.5) 0,4.5 ccw(c4.5,4.5)
  pour cut-out: 92.5,0 ccw(c92.5,4.5) 97,4.5 ccw(c92.5,4.5) 92.5,9 ccw(c92.5,4.5) 88,4.5 ccw(c92.5,4.5)
  pour cut-out: 92.5,73.5 ccw(c92.5,78) 97,78 ccw(c92.5,78) 92.5,82.5 ccw(c92.5,78) 88,78 ccw(c92.5,78)
Bottom Layer:
  pour cut-out: 4.5,73.5 ccw(c4.5,78) 9,78 ccw(c4.5,78) 4.5,82.5 ccw(c4.5,78) 0,78 ccw(c4.5,78)
  pour cut-out: 4.5,0 ccw(c4.5,4.5) 9,4.5 ccw(c4.5,4.5) 4.5,9 ccw(c4.5,4.5) 0,4.5 ccw(c4.5,4.5)
  pour cut-out: 92.5,0 ccw(c92.5,4.5) 97,4.5 ccw(c92.5,4.5) 92.5,9 ccw(c92.5,4.5) 88,4.5 ccw(c92.5,4.5)
  pour cut-out: 92.5,73.5 ccw(c92.5,78) 97,78 ccw(c92.5,78) 92.5,82.5 ccw(c92.5,78) 88,78 ccw(c92.5,78)
Multi-Layer:
  pour cut-out: 48,16.4 47,16.4 47,14.434 48,14.434
  pour cut-out: 47,1.5 48,1.5 48,3.566 47,3.566

## Silkscreen, mask and mechanical layers (free items; w line width, h text height)
Top Overlay:
  drawing of 16 lines, arcs and shapes, not listed
  text "Voltage" at 26.598,79.917 h1.75
  text "Current" at 62.398,79.625 h1.75
  text "+3V3" at 4.301,67.3 h1.2
  text "UART" at 89.05,66.15 h1.2
  text "Boot" at 28.3,49.65 h1.2
  text "On" at 83.6,43.451 h1.2 r90
  text "Run" at 28.3,41.15 h1.2
  text "Okay" at 78.9,41.051 h1.2 r90
  text "Error" at 70.1,40.052 h1.2 r90
  text "Warning" at 74.4,37.653 h1.2 r90
  text "+5V" at 5.501,31.1 h1.2
  text "Battery" at 51.55,31.017 h1.4
  text "Max Current" at 70.052,30.5 h1.2
  text "Monitor" at 51.55,28.55 h1.4
  text "RADM" at 51.55,25.55 h1.2
  text "80A" at 70.918,24.422 h4
  text "V1" at 51.504,23.546 h1.2
  text "Load-" at 11.701,13.3 h1.2
  text "Load+" at 21.201,13.3 h1.2
  text "Batt+" at 62.901,13.3 h1.2
  text "Batt-" at 72.401,13.3 h1.2
Bottom Overlay:
  drawing of 19 lines, arcs and shapes, not listed
  text "Russell" at 72.32,73.4 h1.2
  text "MIL" at 84.177,73.4 h1.2
  text "MacGregor" at 73.719,71.6 h1.2
  text "Spring '25" at 88.175,71.5 h1.2
  text "+3V3" at 9.885,63.5 h1
  text "GND" at 89.78,62.58 h1
  text "RXD" at 89.78,60.04 h1
  text "GND" at 8.886,58.42 h1
  text "TXD" at 89.78,57.5 h1
  text "FlashSS" at 34.249,47.2 h1
  text "QSPI_SS" at 41.948,44.795 h1
  text "GPIO0" at 39.949,42.045 h1
  text "3V3" at 28.694,41.083 h1 r90
  text "PNAR" at 36.321,34.5 h1
  text "USBGND-GND" at 19.709,32.52 h1
  text "+5V" at 8.886,27.5 h1
  text "Board" at 84.75,22.55 h1.2
  text "+5V" at 8.886,22.42 h1
  text "Dim" at 84.75,20.75 h1.2
  text "82.5mm" at 86.75,20.326 h1.2 r270
  text "97mm" at 84.074,17.55 h1.2
  text "GND" at 8.886,17.34 h1
  text "Load-" at 17.299,13.3 h1.2
  text "Load+" at 26.799,13.3 h1.2
  text "Batt+" at 68.099,13.3 h1.2
  text "Batt-" at 77.599,13.3 h1.2
  text "GND" at 8.886,12.26 h1
  text "M3.5" at 85.25,3.9 h1.2

## Text inside footprints (layer, text, board x,y; h text height)
C25: Bottom Overlay "+" at 71.742,43.934 h1.5 r90
C26: Top Overlay "+" at 88.317,15.001 h1.3
SEG1: Top Overlay "(Common Cathode)" at 41.041,62.186 h1.2; Top Overlay "D4" at 56.105,56.21 h1.2 r45; Top Overlay "G" at 53.989,56.21 h1.2 r45; Top Overlay "C" at 51.449,56.21 h1.2 r45; Top Overlay "DP" at 48.485,56.21 h1.2 r45; Top Overlay "D" at 46.369,56.21 h1.2 r45; Top Overlay "E" at 43.829,56.21 h1.2 r45; Top Overlay "4-Digit 7seg Display" at 35.918,65.286 h1.5; Top Overlay "B" at 56.529,73.948 h1.2 r45; Top Overlay "D3" at 53.565,73.1 h1.2 r45; Top Overlay "D2" at 51.025,73.1 h1.2 r45; Top Overlay "F" at 48.909,73.948 h1.2 r45; Top Overlay "A" at 46.369,73.948 h1.2 r45; Top Overlay "D1" at 43.547,73.382 h1.2 r45
T1: Top Overlay "2-Pin Screw / Term" at 6.345,66.032 h0.75 r270; Top Overlay "[Front]" at 1.458,65.882 h0.75 r270
T2: Top Overlay "[Front]" at 1.458,29.882 h0.75 r270; Top Overlay "4-Pin Screw Term" at 7.681,29.882 h0.75 r270
X1: Top Overlay "Port" at 0.95,46.799 h1.2 r270